# Altium PCB 2Motor16servoV3.PcbDoc (part 2 of 3)
Units mil, origin at the board's own origin, x right, y up, seen from the top; angles counter-clockwise.
Board outline 6000 x 4000 mil, 2 copper layers (Top Layer, Bottom Layer); 79 components, 93 nets, 290 pads, 78 vias.
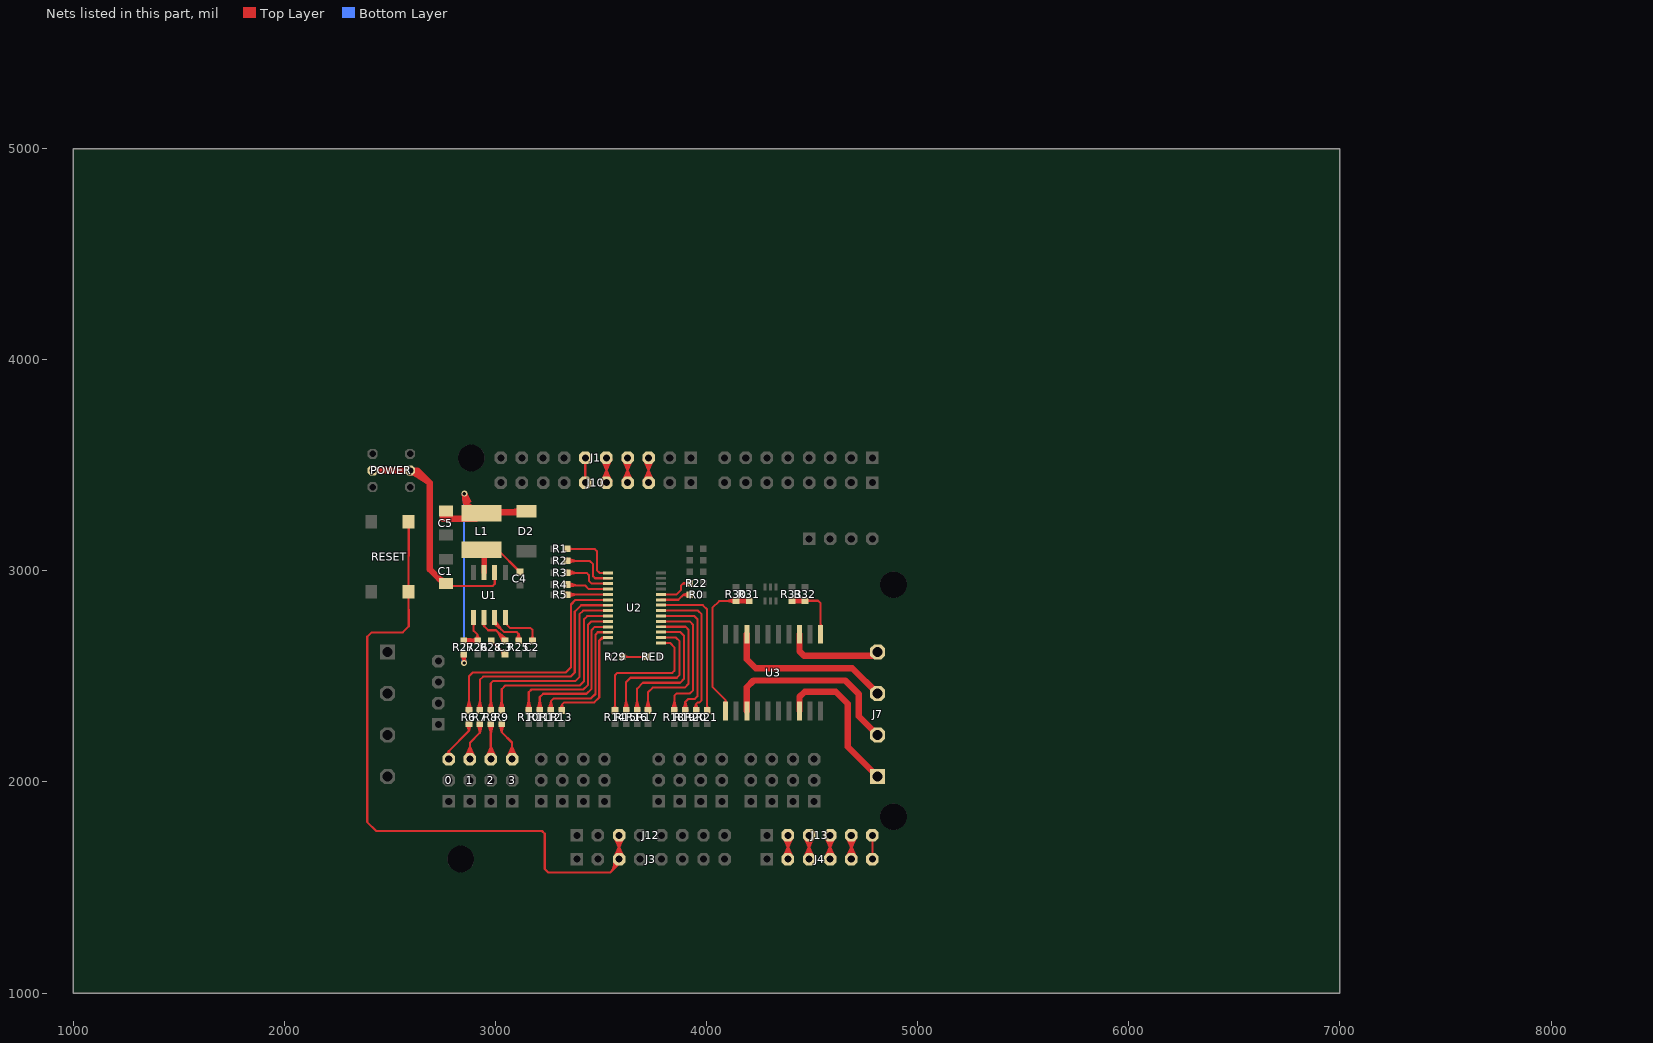
[diagram p2: the nets of this part, all layers, seen from the top]

## Via types
v1: diameter 23.62, hole 11.81, Top Layer to Bottom Layer, tented both sides, 50 vias
v2: diameter 27.56, hole 15.75, Top Layer to Bottom Layer, tented both sides, 28 vias

## Nets (pads, with @x,y where several pads share a name; then routed paths per layer and width w, separated by ;. In a path a pad name is that pad's centre, name@x,y a point inside that pad or via, vN(x,y) a via of type N, cw(c..) or ccw(c..) an arc to the next point about the centre after c; other vN are vias at no path point) (continued)
GPIO16: J1.3 J10.3 | length 1097.1
  Top Layer w10: J10.3@3701,3423.05 3725,3477.53 ; J1.3@3701,3529.95 3725,3475.47 ; J10.3@3707.66,3435.34 ccw(c3665.79,3477.21) 3725,3477.21 ccw(c3784.21,3477.21) J10.3@3742.34,3435.34 ; J10.3@3710.58,3419.77 3725,3477.53 ; J1.3@3710.58,3533.23 3725,3475.47 ; J10.3@3714.73,3428.27 ccw(c3689.93,3453.07) 3725,3453.07 ccw(c3760.07,3453.07) J10.3@3735.27,3428.27 ; J10.3@3725,3418 J1.3@3725,3535 3725,3475.47 ; J10.3@3739.42,3419.77 3725,3477.53 ; J1.3@3739.42,3533.23 3725,3475.47 ; J10.3@3749,3423.05 3725,3477.53 ; J1.3@3749,3529.95 3725,3475.47 ; 3725,3475.79 cw(c3784.21,3475.79) 3742.34,3517.66 ccw(c3784.21,3475.79) 3725,3475.79 ; 3725,3475.79 ccw(c3665.79,3475.79) 3707.66,3517.66 cw(c3665.79,3475.79) 3725,3475.79 ; 3725,3499.93 cw(c3760.07,3499.93) 3735.27,3524.73 ccw(c3760.07,3499.93) 3725,3499.93 ; 3725,3499.93 ccw(c3689.93,3499.93) 3714.73,3524.73 cw(c3689.93,3499.93) 3725,3499.93
NC1: J4.2 J13.2 | length 1092.1
  Top Layer w10: J4.2@4361,1640.05 4385,1694.53 ; J13.2@4361,1741.95 4385,1687.47 ; J4.2@4367.66,1652.34 ccw(c4325.79,1694.21) 4385,1694.21 ccw(c4444.21,1694.21) J4.2@4402.34,1652.34 ; J4.2@4370.58,1636.77 4385,1694.53 ; J13.2@4370.58,1745.23 4385,1687.47 ; J4.2@4374.73,1645.27 ccw(c4349.93,1670.07) 4385,1670.07 ccw(c4420.07,1670.07) J4.2@4395.27,1645.27 ; J4.2@4385,1635 J13.2@4385,1747 4385,1687.47 ; J4.2@4399.42,1636.77 4385,1694.53 ; J13.2@4399.42,1745.23 4385,1687.47 ; J4.2@4409,1640.05 4385,1694.53 ; J13.2@4409,1741.95 4385,1687.47 ; 4385,1687.79 cw(c4444.21,1687.79) 4402.34,1729.66 ccw(c4444.21,1687.79) 4385,1687.79 ; 4385,1687.79 ccw(c4325.79,1687.79) 4367.66,1729.66 cw(c4325.79,1687.79) 4385,1687.79 ; 4385,1711.93 cw(c4420.07,1711.93) 4395.27,1736.73 ccw(c4420.07,1711.93) 4385,1711.93 ; 4385,1711.93 ccw(c4349.93,1711.93) 4374.73,1736.73 cw(c4349.93,1711.93) 4385,1711.93
NC2: J4.3 J13.3 | length 1092.1
  Top Layer w10: J4.3@4461,1640.05 4485,1694.53 ; J13.3@4461,1741.95 4485,1687.47 ; J4.3@4467.66,1652.34 ccw(c4425.79,1694.21) 4485,1694.21 ccw(c4544.21,1694.21) J4.3@4502.34,1652.34 ; J4.3@4470.58,1636.77 4485,1694.53 ; J13.3@4470.58,1745.23 4485,1687.47 ; J4.3@4474.73,1645.27 ccw(c4449.93,1670.07) 4485,1670.07 ccw(c4520.07,1670.07) J4.3@4495.27,1645.27 ; J4.3@4485,1635 J13.3@4485,1747 4485,1687.47 ; J4.3@4499.42,1636.77 4485,1694.53 ; J13.3@4499.42,1745.23 4485,1687.47 ; J4.3@4509,1640.05 4485,1694.53 ; J13.3@4509,1741.95 4485,1687.47 ; 4485,1687.79 cw(c4544.21,1687.79) 4502.34,1729.66 ccw(c4544.21,1687.79) 4485,1687.79 ; 4485,1687.79 ccw(c4425.79,1687.79) 4467.66,1729.66 cw(c4425.79,1687.79) 4485,1687.79 ; 4485,1711.93 cw(c4520.07,1711.93) 4495.27,1736.73 ccw(c4520.07,1711.93) 4485,1711.93 ; 4485,1711.93 ccw(c4449.93,1711.93) 4474.73,1736.73 cw(c4449.93,1711.93) 4485,1711.93
NC3: J4.4 J13.4 | length 1092.1
  Top Layer w10: J4.4@4561,1640.05 4585,1694.53 ; J13.4@4561,1741.95 4585,1687.47 ; J4.4@4567.66,1652.34 ccw(c4525.79,1694.21) 4585,1694.21 ccw(c4644.21,1694.21) J4.4@4602.34,1652.34 ; J4.4@4570.58,1636.77 4585,1694.53 ; J13.4@4570.58,1745.23 4585,1687.47 ; J4.4@4574.73,1645.27 ccw(c4549.93,1670.07) 4585,1670.07 ccw(c4620.07,1670.07) J4.4@4595.27,1645.27 ; J4.4@4585,1635 J13.4@4585,1747 4585,1687.47 ; J4.4@4599.42,1636.77 4585,1694.53 ; J13.4@4599.42,1745.23 4585,1687.47 ; J4.4@4609,1640.05 4585,1694.53 ; J13.4@4609,1741.95 4585,1687.47 ; 4585,1687.79 cw(c4644.21,1687.79) 4602.34,1729.66 ccw(c4644.21,1687.79) 4585,1687.79 ; 4585,1687.79 ccw(c4525.79,1687.79) 4567.66,1729.66 cw(c4525.79,1687.79) 4585,1687.79 ; 4585,1711.93 cw(c4620.07,1711.93) 4595.27,1736.73 ccw(c4620.07,1711.93) 4585,1711.93 ; 4585,1711.93 ccw(c4549.93,1711.93) 4574.73,1736.73 cw(c4549.93,1711.93) 4585,1711.93
NC4: J4.5 J13.5 | length 1092.1
  Top Layer w10: J4.5@4661,1640.05 4685,1694.53 ; J13.5@4661,1741.95 4685,1687.47 ; J4.5@4667.66,1652.34 ccw(c4625.79,1694.21) 4685,1694.21 ccw(c4744.21,1694.21) J4.5@4702.34,1652.34 ; J4.5@4670.58,1636.77 4685,1694.53 ; J13.5@4670.58,1745.23 4685,1687.47 ; J4.5@4674.73,1645.27 ccw(c4649.93,1670.07) 4685,1670.07 ccw(c4720.07,1670.07) J4.5@4695.27,1645.27 ; J4.5@4685,1635 J13.5@4685,1747 4685,1687.47 ; J4.5@4699.42,1636.77 4685,1694.53 ; J13.5@4699.42,1745.23 4685,1687.47 ; J4.5@4709,1640.05 4685,1694.53 ; J13.5@4709,1741.95 4685,1687.47 ; 4685,1687.79 cw(c4744.21,1687.79) 4702.34,1729.66 ccw(c4744.21,1687.79) 4685,1687.79 ; 4685,1687.79 ccw(c4625.79,1687.79) 4667.66,1729.66 cw(c4625.79,1687.79) 4685,1687.79 ; 4685,1711.93 cw(c4720.07,1711.93) 4695.27,1736.73 ccw(c4720.07,1711.93) 4685,1711.93 ; 4685,1711.93 ccw(c4649.93,1711.93) 4674.73,1736.73 cw(c4649.93,1711.93) 4685,1711.93
NC5: J4.6 J13.6 | length 112
  Top Layer w10: J4.6@4785,1635 J13.6@4785,1747
NC6: J1.6 J10.6 | length 117
  Top Layer w10: J10.6@3425,3418 J1.6@3425,3535
NC11: J1.5 J10.5 | length 1097.1
  Top Layer w10: J10.5@3501,3423.05 3525,3477.53 ; J1.5@3501,3529.95 3525,3475.47 ; J10.5@3507.66,3435.34 ccw(c3465.79,3477.21) 3525,3477.21 ccw(c3584.21,3477.21) J10.5@3542.34,3435.34 ; J10.5@3510.58,3419.77 3525,3477.53 ; J1.5@3510.58,3533.23 3525,3475.47 ; J10.5@3514.73,3428.27 ccw(c3489.93,3453.07) 3525,3453.07 ccw(c3560.07,3453.07) J10.5@3535.27,3428.27 ; J10.5@3525,3418 J1.5@3525,3535 3525,3475.47 ; J10.5@3539.42,3419.77 3525,3477.53 ; J1.5@3539.42,3533.23 3525,3475.47 ; J10.5@3549,3423.05 3525,3477.53 ; J1.5@3549,3529.95 3525,3475.47 ; 3525,3475.79 cw(c3584.21,3475.79) 3542.34,3517.66 ccw(c3584.21,3475.79) 3525,3475.79 ; 3525,3475.79 ccw(c3465.79,3475.79) 3507.66,3517.66 cw(c3465.79,3475.79) 3525,3475.79 ; 3525,3499.93 cw(c3560.07,3499.93) 3535.27,3524.73 ccw(c3560.07,3499.93) 3525,3499.93 ; 3525,3499.93 ccw(c3489.93,3499.93) 3514.73,3524.73 cw(c3489.93,3499.93) 3525,3499.93
NC12: J1.4 J10.4 | length 1097.1
  Top Layer w10: J10.4@3601,3423.05 3625,3477.53 ; J1.4@3601,3529.95 3625,3475.47 ; J10.4@3607.66,3435.34 ccw(c3565.79,3477.21) 3625,3477.21 ccw(c3684.21,3477.21) J10.4@3642.34,3435.34 ; J10.4@3610.58,3419.77 3625,3477.53 ; J1.4@3610.58,3533.23 3625,3475.47 ; J10.4@3614.73,3428.27 ccw(c3589.93,3453.07) 3625,3453.07 ccw(c3660.07,3453.07) J10.4@3635.27,3428.27 ; J10.4@3625,3418 J1.4@3625,3535 3625,3475.47 ; J10.4@3639.42,3419.77 3625,3477.53 ; J1.4@3639.42,3533.23 3625,3475.47 ; J10.4@3649,3423.05 3625,3477.53 ; J1.4@3649,3529.95 3625,3475.47 ; 3625,3475.79 cw(c3684.21,3475.79) 3642.34,3517.66 ccw(c3684.21,3475.79) 3625,3475.79 ; 3625,3475.79 ccw(c3565.79,3475.79) 3607.66,3517.66 cw(c3565.79,3475.79) 3625,3475.79 ; 3625,3499.93 cw(c3660.07,3499.93) 3635.27,3524.73 ccw(c3660.07,3499.93) 3625,3499.93 ; 3625,3499.93 ccw(c3589.93,3499.93) 3614.73,3524.73 cw(c3589.93,3499.93) 3625,3499.93
NetC1_1: C1.1 POWER.2 U1.2 | length 1493.8
  Top Layer w10: C1.1@2765.99,2929.01 2987.01,2929.01 2996,2938 U1.2@2996,2993 ; U1.2@2991.18,2964.56 cw(c2979.56,2952.93) 2996,2952.93 cw(c3012.44,2952.93) U1.2@3000.82,2964.56
  Top Layer w30: POWER.2@2418,3475.74 POWER.2@2595.17,3475.74 ; 2481.54,3475.74 POWER.2@2595.17,3475.74 ; POWER.2@2595.17,3467.12 cw(c2595.17,3363.99) 2668.09,3436.91 ; C1.1@2733.7,2961.3 ccw(c2757.13,2984.73) C1.1@2757.13,2951.6 ; C1.1@2765.99,2929.01 2688,3007 2688,3417 ; POWER.2@2595.17,3475.74 2629.26,3475.74 ; POWER.2@2595.17,3475.74 2688,3417 ; POWER.2@2595.17,3475.74 2629.26,3475.74 ; 2629.26,3475.74 2688,3417
NetC2_1: C2.1 U1.8 | length 277.9
  Top Layer w10: U1.8@3046,2778.43 3046,2752 3069,2729 3166,2729 3174.59,2720.41 C2.1@3174.59,2669.59 ; U1.8@3052.81,2754.81 ccw(c3076.04,2754.81) 3059.61,2738.39 ; C2.1@3166.99,2677.19 ccw(c3148.64,2695.54) 3174.59,2695.54 ccw(c3200.54,2695.54) C2.1@3182.19,2677.19
NetC3_1: C3.1 U1.6 | length 659.4
  Top Layer w10: U1.6@2939.33,2753.43 2946,2738 ; U1.6@2946,2754.81 2946,2738 ; U1.6@2946,2778.43 2946,2738 ; U1.6@2952.67,2753.43 2946,2738 ; 3010.72,2710.02 cw(c2972.07,2660.97) C3.1@3034.08,2668.32 ; 3011.23,2710.44 ccw(c3066.5,2739.47) C3.1@3047.95,2679.85 ; 3021.7,2699.3 cw(c2991.99,2669.59) C3.1@3034.01,2669.59 ; 3022.45,2689.06 ccw(c3056.36,2706.87) C3.1@3044.98,2670.3 ; 3029.68,2695.08 cw(c3005.98,2664.99) C3.1@3044.01,2669.5 ; C3.1@3034.05,2670.58 ccw(c3008.21,2672.96) 3028.17,2689.54 ccw(c3048.12,2706.13) C3.1@3045.74,2680.29 ; C3.1@3035.82,2663.62 3011.96,2709.04 ; C3.1@3052.25,2677.29 3011.96,2709.04 ; 2946,2738 2965,2719 3002,2719 3044.76,2676.24 C3.1@3044.76,2669.59 3011.96,2709.04 ; 2946,2738.37 cw(c2962.44,2738.37) 2950.82,2749.99 ccw(c2962.44,2738.37) 2946,2738.37 ; 2946,2738.37 ccw(c2929.56,2738.37) 2941.18,2749.99 cw(c2929.56,2738.37) 2946,2738.37
NetC3_2: C3.2 R28.2 | length 131.7
  Top Layer w10: R28.2@2979.84,2669.4 3042.64,2606.6 C3.2@3044.76,2606.6 ; 3022.8,2626.44 ccw(c3044.76,2648.4) C3.2@3044.76,2617.35 ; 3027.9,2621.33 cw(c3013.17,2606.6) C3.2@3034.01,2606.6
NetC4_1: C4.1 L1.2 U1.3 | length 409.5
  Top Layer w10: L1.2@2946,3088.39 L1.2@2934,3100.39 3009.75,3100.39 C4.1@3115.54,2994.59
  Top Layer w25: U1.3@2946,2993 2946,3088.39 U1.3@2946,3016.62
NetC5_2: C5.2 D2.1 L1.1 R27.1 | length 4191.3
  Top Layer w10: R27.1@2839.37,2604.8 v2(2851,2564) ; R27.1@2842.4,2598.81 cw(c2821.64,2578.05) 2851,2578.05 ; R27.1@2842.58,2598.63 cw(c2824.67,2579.86) 2850.61,2580.47 cw(c2876.55,2581.08) R27.1@2857.78,2598.99 ; v2@2843.22,3365.79 2848.67,3322.31 ; R27.1@2843.23,2591.25 cw(c2854.82,2594.55) R27.1@2850.28,2605.72 ; v2@2843.26,3365.12 2852,3322.22 ; v2@2843.29,3364.87 2853.28,3322.23 v2@2860.76,3365.38 ; v2@2843.33,2568.27 ccw(c2824.81,2578.57) 2845.19,2584.38 ccw(c2865.57,2590.19) v2@2855.27,2571.67 ; v2@2843.46,3363.97 2857.85,3322.49 v2@2860.77,3366.29 ; v2@2843.85,3362.72 2864.39,3323.42 v2@2860.63,3367.61 ; v2@2844.42,3361.56 2870.94,3324.98 v2@2860.29,3368.89 ; v2@2844.65,2570.06 ccw(c2829.31,2584.69) 2850.5,2585.19 ccw(c2871.69,2585.69) v2@2857.06,2570.35 ; v2@2844.79,2570.21 ccw(c2829.8,2585.2) 2851,2585.2 ccw(c2872.2,2585.2) v2@2857.21,2570.21 ; v2@2844.92,3360.81 2875.56,3326.44 v2@2859.94,3369.75 ; v2@2845.34,3360.28 cw(c2829.26,3346.47) 2850.39,3344.87 cw(c2871.53,3343.26) v2@2857.72,3359.34 ; v2@2845.49,3360.11 2880.28,3328.2 v2@2859.49,3370.58 ; 2845.97,3353.45 cw(c2858.43,3356.37) v2@2851.32,3367.01 ; v2@2845.99,3359.6 cw(c2829.78,3342.37) 2852.54,3335.91 ; 2846.29,2580.53 cw(c2859.05,2584.16) R27.1@2854.05,2596.45 ; v2@2846.37,2571.46 ccw(c2835.21,2589.48) 2855.84,2584.64 ccw(c2876.48,2579.79) v2@2858.46,2568.63 ; v2@2846.34,3359.29 cw(c2813.45,3320.28) 2864.29,3324.61 ; v2@2847.43,3358.5 cw(c2820.87,3314.93) 2870.46,3326.96 ; v2@2847.61,3358.4 cw(c2837.01,3340.04) 2857.48,3345.53 ; 2847.9,3342.37 cw(c2861.83,3345.21) v2@2855.75,3358.06 ; 2848.24,3350.18 cw(c2864.76,3355.92) v2@2851.04,3366.76 ; v2@2849.16,3357.69 cw(c2832.65,3309.39) 2878.48,3331.87 ; 2849.26,3339.4 cw(c2867,3343.55) v2@2856.88,3358.7 ; v2@2849.42,3357.61 cw(c2845.32,3344.27) 2859.24,3343.34 ; R27.1@2850,2606.41 v2(2851,2564) ; v2@2850.04,3357.44 cw(c2847.88,3347.97) 2857.45,3346.31 ; v2@2850.78,3365.95 ccw(c2877.65,3367.11) 2859.47,3347.28 ; v2@2850.78,3366.07 ccw(c2877.63,3364.53) 2857.56,3346.63 ; v2@2850.8,3366.21 ccw(c2876.45,3361.75) 2855.37,3346.47 ; v2@2850.87,3366.47 ccw(c2871.29,3357.97) 2851.69,3347.73 ; 2851,2582.88 cw(c2873.53,2582.88) R27.1@2857.6,2598.81 ; R27.1@2851,2605.41 v2(2851,2564) ; L1.1@2852,3305.67 ccw(c2892.43,3305.67) L1.1@2876.69,3268.43 ; 2852,3320.75 ccw(c2898.8,3320.75) L1.1@2880.58,3277.64 ; 2852,3335.83 ccw(c2905.18,3335.83) L1.1@2884.48,3286.85 ; 2852,3350.91 ccw(c2911.55,3350.91) L1.1@2888.37,3296.06 ; v2@2852.39,3367.15 cw(c2843.7,3341.7) 2867.84,3353.55 ; v2@2852.52,3367.1 cw(c2841.08,3342.77) 2866.38,3351.89 ; v2@2852.64,3367.04 cw(c2838.64,3344.08) 2864.77,3350.42 ; v2@2852.79,3366.93 cw(c2835.46,3346.38) 2862.24,3348.66 ; v2@2852.84,3366.89 cw(c2842.47,3355.86) 2857.03,3351.73 ; 2854.22,3332.95 cw(c2881.73,3342.5) v2@2858.89,3360.56 ; 2856.1,3342.37 ccw(c2842.17,3345.21) 2848.25,3358.06 cw(c2826.56,3311.86) 2874.57,3329.18 ; 2857.49,3345.52 cw(c2877.96,3351.01) v2@2859.6,3361.61 ; v2@2860.1,3362.63 ccw(c2896.95,3347.28) 2861.58,3328.81 ; v2@2860.64,3364.46 2848.67,3322.31 ; v2@2860.65,3364.5 ccw(c2908.98,3356.09) 2869.26,3327.3 ; R27.1@2860.69,2605.3 v2(2851,2564) ; v2@2860.74,3365.12 2852,3322.22 ; v2@2860.77,3365.5 ccw(c2911.72,3362.58) 2873.62,3328.61 ; v2@2860.77,3366.38 ccw(c2911.76,3368.58) 2877.26,3330.97 ; L1.1@2892.26,3305.27 cw(c2917.92,3366) v2(2852,3366) ; L1.1@2907.54,3247.15 L1.1@2934,3273.61 ; L1.1@2938,3277.61 L1.1@2934,3273.61 ; 2848.67,3322.31 v2(2852,3366) ; 2852,3322.22 v2(2852,3366) ; 2852,3344.8 cw(c2873.2,3344.8) 2858.21,3359.79 ccw(c2873.2,3344.8) 2852,3344.8 ; 2852,3344.8 ccw(c2830.8,3344.8) 2845.79,3359.79 cw(c2830.8,3344.8) 2852,3344.8 ; v2(2852,3366) 2852,3302 2880.39,3273.61 L1.1@2934,3273.61
  Top Layer w30: C5.2@2757.13,3283.7 2749,3247.15 L1.1@2907.54,3247.15 ; L1.1@2938,3277.61 D2.1@3146,3277.61 ; 3079.93,3277.61 ccw(c3079.93,3331.46) D2.1@3118.01,3293.38
  Bottom Layer w10: v2@2842.26,2564.88 2851,2607.78 v2@2859.74,2564.88 ; v2@2843.25,3365.32 2851,3322.19 ; v2@2844.79,2570.21 ccw(c2829.8,2585.2) 2851,2585.2 ccw(c2872.2,2585.2) v2@2857.21,2570.21 ; v2@2845.65,3359.94 cw(c2830.33,3345.29) 2851.52,3344.81 cw(c2872.71,3344.33) v2@2858.06,3359.65 ; v2@2845.79,3359.79 cw(c2833.22,3347.22) 2851,3347.22 ; 2846.84,3345.33 cw(c2857.43,3347.23) v2@2854.44,3357.57 ; 2846.9,2587.63 ccw(c2860.83,2584.79) v2@2854.75,2571.94 ; v2@2847.25,2571.94 ccw(c2841.17,2584.79) 2855.1,2587.63 ; v2@2847.33,3358.57 cw(c2838.05,3343.82) 2855.04,3339.96 ; v2(2851,2564) v2@2851,3366 ; 2851,3342.39 cw(c2875.61,3342.39) v2@2858.21,3359.79 ; v2(2852,3366) 2851,3322.19 ; v2@2860.71,3364.92 2851,3322.19
NetR1_1: R1.1 U2.1 | length 368.6
  Top Layer w10: R1.1@3338.59,3103.59 3469.41,3103.59 3480,3093 3480,3003 3492.32,2990.68 ; R1.1@3346.19,3096.99 cw(c3362.12,3081.06) 3362.12,3103.59 ; R1.1@3346.19,3112.19 ccw(c3366.95,3132.95) 3366.95,3103.59 ; U2.1@3515.27,2990.68 3492.32,2990.68 ; U2.1@3544,2990.68 3492.32,2990.68
NetR2_1: R2.1 U2.2 | length 568.2
  Top Layer w10: R2.1@3338.59,3047.19 3445.81,3047.19 3462,3031 3462,2974 3470.91,2965.09 U2.2@3544,2965.09 ; R2.1@3338.59,3048.19 3384.36,3047.19 ; R2.1@3339.27,3047.88 cw(c3351.18,3042.33) 3354.52,3055.04 ; R2.1@3339.62,3037.49 3384.36,3047.19 ; R2.1@3340.09,3058.84 3384.36,3047.19 ; R2.1@3346.02,3040.43 cw(c3363.97,3021.68) 3364.53,3047.63 cw(c3365.1,3073.57) R2.1@3346.35,3055.62 ; R2.1@3346.19,3040.59 cw(c3362.12,3024.66) 3362.12,3047.19 ; R2.1@3346.19,3055.79 ccw(c3366.95,3076.55) 3366.95,3047.19 ; R2.1@3348.34,3043.66 cw(c3362.2,3037.21) 3366.09,3052 ; 3478.38,2965.09 U2.2@3515.27,2965.09
NetR3_1: R3.1 U2.3 | length 537.8
  Top Layer w10: R3.1@3338.59,2990.79 3431.21,2990.79 3442,2980 3442,2953 3455.5,2939.5 U2.3@3544,2939.5 ; R3.1@3338.59,2991.79 3384.36,2990.79 ; R3.1@3339.27,2991.48 cw(c3351.18,2985.94) 3354.52,2998.64 ; R3.1@3339.62,2981.1 3384.36,2990.79 ; R3.1@3340.09,3002.44 3384.36,2990.79 ; R3.1@3346.02,2984.03 cw(c3363.97,2965.29) 3364.53,2991.23 cw(c3365.1,3017.17) R3.1@3346.35,2999.23 ; R3.1@3346.19,2984.19 cw(c3362.12,2968.26) 3362.12,2990.79 ; R3.1@3346.19,2999.39 ccw(c3366.95,3020.16) 3366.95,2990.79 ; R3.1@3348.34,2987.26 cw(c3362.2,2980.81) 3366.09,2995.6 ; 3478.38,2939.5 U2.3@3515.27,2939.5
NetR4_1: R4.1 U2.4 | length 519.7
  Top Layer w10: R4.1@3338.82,2924.65 3384.85,2931 ; R4.1@3339.16,2934.92 cw(c3352.31,2923.93) 3357.81,2940.16 ; R4.1@3340.84,2945.91 3384.85,2931 ; R4.1@3341.99,2931 3425,2931 3442.09,2913.91 U2.4@3544,2913.91 ; R4.1@3341.99,2932 R4.1@3338.59,2935.4 3384.85,2931 ; R4.1@3345.44,2927.11 cw(c3361.97,2907.11) 3364.42,2932.94 cw(c3366.88,2958.77) R4.1@3346.88,2942.24 ; R4.1@3346.19,2927.8 cw(c3353.92,2920.07) R4.1@3353.92,2931 ; R4.1@3346.19,2943 ccw(c3375.15,2971.96) 3375.15,2931 ; R4.1@3346.84,2928.51 cw(c3364.32,2913.89) 3371.64,2935.48 ; 3478.38,2913.91 U2.4@3515.27,2913.91
NetR5_1: R5.1 U2.5 | length 505
  Top Layer w10: R5.1@3338.59,2888.31 U2.5@3544,2888.31 ; R5.1@3339.26,2887.34 ccw(c3351.35,2893.41) 3354.88,2880.34 ; R5.1@3339.54,2897.71 3384.39,2888.31 ; R5.1@3340.16,2876.37 3384.39,2888.31 ; R5.1@3340.91,2889.31 R5.1@3338.59,2887 3384.39,2888.31 ; R5.1@3345.97,2894.81 ccw(c3363.78,2913.68) 3364.53,2887.74 ccw(c3365.27,2861.81) R5.1@3346.41,2879.62 ; R5.1@3346.19,2879.4 cw(c3367.71,2857.88) 3367.71,2888.31 ; R5.1@3346.19,2894.6 ccw(c3361.37,2909.77) 3361.37,2888.31 ; R5.1@3348.2,2891.82 ccw(c3362.52,2899.01) 3366.7,2883.54 ; 3478.38,2888.31 U2.5@3515.27,2888.31
NetR6_1: R6.1 U2.6 | length 1398.4
  Top Layer w10: R6.1@2863.33,2339.85 2874,2384.34 R6.1@2884.67,2339.85 ; R6.1@2866.4,2346.19 ccw(c2848.05,2364.54) 2874,2364.54 ccw(c2899.95,2364.54) R6.1@2881.6,2346.19 ; R6.1@2866.55,2353.28 ccw(c2878.07,2350.51) R6.1@2874.24,2339.3 ; 2869.11,2363.95 ccw(c2881.63,2360.95) R6.1@2877.47,2348.76 ; R6.1@2870.53,2348.76 ccw(c2866.37,2360.95) 2878.89,2363.95 ; R6.1@2873.76,2339.3 ccw(c2869.93,2350.51) R6.1@2881.45,2353.28 ; R6.1@2874,2338.59 2874,2501 2892,2519 3332,2519 3357,2544 3357,2841 3378.72,2862.72 U2.6@3544,2862.72 ; 3478.38,2862.72 U2.6@3515.27,2862.72
NetR7_1: R7.1 U2.7 | length 1320.7
  Top Layer w10: R7.1@2914.99,2339.85 2925.67,2384.34 R7.1@2936.34,2339.85 ; R7.1@2918.07,2346.19 ccw(c2899.72,2364.54) 2925.67,2364.54 ccw(c2951.61,2364.54) R7.1@2933.27,2346.19 ; R7.1@2918.21,2353.28 ccw(c2929.74,2350.51) R7.1@2925.91,2339.3 ; 2920.78,2363.95 ccw(c2933.3,2360.95) R7.1@2929.14,2348.76 ; R7.1@2922.19,2348.76 ccw(c2918.04,2360.95) 2930.56,2363.95 ; R7.1@2925.43,2339.3 ccw(c2921.6,2350.51) R7.1@2933.12,2353.28 ; R7.1@2925.67,2338.59 2925.67,2483.67 2941,2499 3355,2499 3375,2519 3375,2807 3405.13,2837.13 U2.7@3544,2837.13 ; 3478.38,2837.13 U2.7@3515.27,2837.13
NetR8_1: R8.1 U2.8 | length 1254.2
  Top Layer w10: R8.1@2966.66,2339.85 2977.33,2384.34 R8.1@2988.01,2339.85 ; R8.1@2969.73,2346.19 ccw(c2951.39,2364.54) 2977.33,2364.54 ccw(c3003.28,2364.54) R8.1@2984.93,2346.19 ; R8.1@2969.88,2353.28 ccw(c2981.4,2350.51) R8.1@2977.57,2339.3 ; 2972.44,2363.95 ccw(c2984.96,2360.95) R8.1@2980.8,2348.76 ; R8.1@2973.86,2348.76 ccw(c2969.7,2360.95) 2982.22,2363.95 ; R8.1@2977.09,2339.3 ccw(c2973.26,2350.51) R8.1@2984.79,2353.28 ; R8.1@2977.33,2338.59 2977.33,2467.33 2989,2479 3379,2479 3397,2497 3397,2794 3414.54,2811.54 U2.8@3544,2811.54 ; 3478.38,2811.54 U2.8@3515.27,2811.54
NetR9_1: R9.1 U2.9 | length 1174.1
  Top Layer w10: R9.1@3018.33,2339.85 3029,2384.34 R9.1@3039.67,2339.85 ; R9.1@3021.4,2346.19 ccw(c3003.05,2364.54) 3029,2364.54 ccw(c3054.95,2364.54) R9.1@3036.6,2346.19 ; R9.1@3021.55,2353.28 ccw(c3033.07,2350.51) R9.1@3029.24,2339.3 ; 3024.11,2363.95 ccw(c3036.63,2360.95) R9.1@3032.47,2348.76 ; R9.1@3025.53,2348.76 ccw(c3021.37,2360.95) 3033.89,2363.95 ; R9.1@3028.76,2339.3 ccw(c3024.93,2350.51) R9.1@3036.45,2353.28 ; R9.1@3029,2338.59 3029,2440 3047,2458 3400,2458 3419,2477 3419,2771 3433.95,2785.95 U2.9@3544,2785.95 ; 3478.38,2785.95 U2.9@3515.27,2785.95
NetR10_1: R10.1 U2.10 | length 1021.5
  Top Layer w10: R10.1@3146.33,2339.85 3157,2384.34 R10.1@3167.67,2339.85 ; R10.1@3149.4,2346.19 ccw(c3131.05,2364.54) 3157,2364.54 ccw(c3182.95,2364.54) R10.1@3164.6,2346.19 ; R10.1@3149.55,2353.28 ccw(c3161.07,2350.51) R10.1@3157.24,2339.3 ; 3152.11,2363.95 ccw(c3164.63,2360.95) R10.1@3160.47,2348.76 ; R10.1@3153.53,2348.76 ccw(c3149.37,2360.95) 3161.89,2363.95 ; R10.1@3156.76,2339.3 ccw(c3152.93,2350.51) R10.1@3164.45,2353.28 ; R10.1@3157,2338.59 3157,2425 3170,2438 3416,2438 3437,2459 3437,2744 3453.36,2760.36 U2.10@3544,2760.36 ; 3478.38,2760.36 U2.10@3515.27,2760.36
NetR11_1: R11.1 U2.11 | length 941.2
  Top Layer w10: R11.1@3198.66,2339.85 3209.33,2384.34 R11.1@3220.01,2339.85 ; R11.1@3201.73,2346.19 ccw(c3183.39,2364.54) 3209.33,2364.54 ccw(c3235.28,2364.54) R11.1@3216.93,2346.19 ; R11.1@3201.88,2353.28 ccw(c3213.4,2350.51) R11.1@3209.57,2339.3 ; 3204.44,2363.95 ccw(c3216.96,2360.95) R11.1@3212.81,2348.76 ; R11.1@3205.86,2348.76 ccw(c3201.7,2360.95) 3214.22,2363.95 ; R11.1@3209.09,2339.3 ccw(c3205.26,2350.51) R11.1@3216.79,2353.28 ; R11.1@3209.33,2338.59 3209.33,2402.33 3225,2418 3431,2418 3455,2442 3455,2720 3469.77,2734.77 U2.11@3544,2734.77 ; 3478.38,2734.77 U2.11@3515.27,2734.77
NetR12_1: R12.1 U2.12 | length 857
  Top Layer w10: R12.1@3251,2339.9 3261.67,2382.67 ; R12.1@3254.07,2346.19 ccw(c3235.72,2364.54) 3261.67,2364.54 ccw(c3287.61,2364.54) R12.1@3269.27,2346.19 ; R12.1@3254.25,2352.92 ccw(c3265.29,2350.17) R12.1@3261.89,2339.3 ; 3256.81,2363.21 ccw(c3268.46,2360.3) R12.1@3264.88,2348.85 ; R12.1@3258.46,2348.85 ccw(c3254.87,2360.3) 3266.52,2363.21 ; R12.1@3261.44,2339.3 ccw(c3258.05,2350.17) R12.1@3269.09,2352.92 ; R12.1@3261.67,2338.59 3261.67,2382.67 ; R12.1@3272.33,2339.9 3261.67,2382.67 ; U2.12@3515.27,2709.18 3484.18,2709.18 ; U2.12@3544,2709.18 3484.18,2709.18 ; 3261.67,2382.67 3275,2396 3452,2396 3473,2417 3473,2698 3484.18,2709.18
NetR13_1: R13.1 U2.13 | length 719.7
  Top Layer w10: R13.1@3303.46,2340.7 3314,2366 ; R13.1@3306.4,2346.19 ccw(c3288.05,2364.54) 3314,2364.54 ccw(c3339.95,2364.54) R13.1@3321.6,2346.19 ; R13.1@3314,2338.59 3314,2366 ; R13.1@3324.54,2340.7 3314,2366 ; 3492.11,2672.11 cw(c3515.27,2648.95) U2.13@3515.27,2681.7 ; U2.13@3544,2683.59 3503.59,2683.59 ; 3314,2366 3325,2377 3468,2377 3491,2400 3491,2671 ; 3491,2671 U2.13@3515.27,2683.59 ; 3491,2671 3503.59,2683.59 ; 3503.59,2683.59 U2.13@3515.27,2683.59 ; 3503.59,2683.59 U2.13@3515.27,2683.59
NetR14_1: R14.1 U2.15 | length 707.9
  Top Layer w10: R14.1@3558.4,2346.19 ccw(c3540.05,2364.54) 3566,2364.54 ccw(c3591.95,2364.54) R14.1@3573.6,2346.19 ; R14.1@3566,2338.59 3566,2506 3577,2517 3837,2517 3847,2527 3847,2638 3826.02,2658.98 ; U2.15@3782.97,2658.98 3826.02,2658.98 ; U2.15@3799.7,2658.98 3826.02,2658.98
NetR15_1: R15.1 U2.16 | length 899.5
  Top Layer w10: R15.1@3607.99,2339.85 3618.67,2384.34 R15.1@3629.34,2339.85 ; R15.1@3611.07,2346.19 ccw(c3592.72,2364.54) 3618.67,2364.54 ccw(c3644.61,2364.54) R15.1@3626.27,2346.19 ; R15.1@3611.21,2353.28 ccw(c3622.74,2350.51) R15.1@3618.91,2339.3 ; 3613.78,2363.95 ccw(c3626.3,2360.95) R15.1@3622.14,2348.76 ; R15.1@3615.2,2348.76 ccw(c3611.04,2360.95) 3623.56,2363.95 ; R15.1@3618.43,2339.3 ccw(c3614.6,2350.51) R15.1@3626.12,2353.28 ; R15.1@3618.67,2338.59 3618.67,2473.67 3639,2494 3858,2494 3872,2508 3872,2666 3853.51,2684.49 U2.16@3782.97,2684.49 ; U2.16@3799.7,2684.49 3836.59,2684.49
NetR16_1: R16.1 U2.17 | length 908.2
  Top Layer w10: R16.1@3659.66,2339.85 3670.33,2384.34 R16.1@3681.01,2339.85 ; R16.1@3662.73,2346.19 ccw(c3644.39,2364.54) 3670.33,2364.54 ccw(c3696.28,2364.54) R16.1@3677.93,2346.19 ; R16.1@3662.88,2353.28 ccw(c3674.4,2350.51) R16.1@3670.58,2339.3 ; 3665.44,2363.95 ccw(c3677.96,2360.95) R16.1@3673.81,2348.76 ; R16.1@3666.86,2348.76 ccw(c3662.7,2360.95) 3675.22,2363.95 ; R16.1@3670.09,2339.3 ccw(c3666.26,2350.51) R16.1@3677.79,2353.28 ; R16.1@3670.33,2338.59 3670.33,2442.33 3698,2470 3874,2470 3892,2488 3892,2694 3875.99,2710.01 U2.17@3782.97,2710.01 ; U2.17@3799.7,2710.01 3836.59,2710.01
NetR17_1: R17.1 U2.18 | length 930.8
  Top Layer w10: R17.1@3711.33,2339.85 3722,2384.34 R17.1@3732.67,2339.85 ; R17.1@3714.4,2346.19 ccw(c3696.05,2364.54) 3722,2364.54 ccw(c3747.95,2364.54) R17.1@3729.6,2346.19 ; R17.1@3714.55,2353.28 ccw(c3726.07,2350.51) R17.1@3722.24,2339.3 ; 3717.11,2363.95 ccw(c3729.63,2360.95) R17.1@3725.47,2348.76 ; R17.1@3718.53,2348.76 ccw(c3714.37,2360.95) 3726.89,2363.95 ; R17.1@3721.76,2339.3 ccw(c3717.93,2350.51) R17.1@3729.45,2353.28 ; R17.1@3722,2338.59 3722,2425 3744,2447 3896,2447 3914,2465 3914,2722 3900.48,2735.52 U2.18@3782.97,2735.52 ; U2.18@3799.7,2735.52 3836.59,2735.52
NetR18_1: R18.1 U2.19 | length 881.5
  Top Layer w10: U2.19@3782.97,2761.04 3918.96,2761.04 3936,2744 3936,2435 3921,2420 3858,2420 3847,2409 R18.1@3847,2338.59 ; U2.19@3799.7,2761.04 3836.59,2761.04 ; R18.1@3836.33,2339.85 3847,2384.34 R18.1@3857.67,2339.85 ; R18.1@3839.4,2346.19 ccw(c3821.05,2364.54) 3847,2364.54 ccw(c3872.95,2364.54) R18.1@3854.6,2346.19 ; R18.1@3839.55,2353.28 ccw(c3851.07,2350.51) R18.1@3847.24,2339.3 ; 3842.11,2363.95 ccw(c3854.63,2360.95) R18.1@3850.47,2348.76 ; R18.1@3843.53,2348.76 ccw(c3839.37,2360.95) 3851.89,2363.95 ; R18.1@3846.76,2339.3 ccw(c3842.93,2350.51) R18.1@3854.45,2353.28
NetR19_1: R19.1 U2.20 | length 811.6
  Top Layer w10: U2.20@3782.97,2786.55 3941.45,2786.55 3956,2772 3956,2406 3943,2393 3913,2393 3898.67,2378.67 ; U2.20@3799.7,2786.55 3836.59,2786.55 ; R19.1@3888.02,2340.03 3898.67,2378.67 ; R19.1@3891.07,2346.19 ccw(c3872.72,2364.54) 3898.67,2364.54 ccw(c3924.61,2364.54) R19.1@3906.27,2346.19 ; R19.1@3898.67,2338.59 3898.67,2378.67 ; R19.1@3909.32,2340.03 3898.67,2378.67
NetR20_1: R20.1 U2.21 | length 812.9
  Top Layer w10: U2.21@3782.97,2812.07 3958.76,2812.07 3976,2794.83 3976,2388 3964,2376 3956,2376 3950.33,2370.33 ; U2.21@3799.7,2812.07 3836.59,2812.07 ; R20.1@3939.74,2340.41 3950.33,2370.33 ; R20.1@3942.73,2346.19 ccw(c3924.39,2364.54) 3950.33,2364.54 ccw(c3976.28,2364.54) R20.1@3957.93,2346.19 ; R20.1@3950.33,2338.59 3950.33,2370.33 ; R20.1@3960.93,2340.41 3950.33,2370.33
NetR21_1: R21.1 U2.22 | length 783.6
  Top Layer w10: U2.22@3782.97,2837.58 3981.42,2837.58 4002,2817 R21.1@4002,2338.59 ; U2.22@3799.7,2837.58 3836.59,2837.58 ; R21.1@3994.4,2346.19 ccw(c3976.05,2364.54) 4002,2364.54 ccw(c4027.95,2364.54) R21.1@4009.6,2346.19
NetR22_1: R22.1 U2.24 | length 379.4
  Top Layer w10: U2.24@3783,2888.61 3857.61,2888.61 3878,2909 3878,2929 3890.4,2941.4 ; U2.24@3799.73,2888.61 3836.62,2888.61 ; R22.1@3918.48,2930.82 3890.4,2941.4 ; R22.1@3918.48,2951.97 3890.4,2941.4 ; 3890.4,2941.4 R22.1@3920.41,2941.4 3890.4,2941.4 ; 3894.46,2941.4 cw(c3894.46,2915.45) 3912.81,2933.8 ccw(c3894.46,2915.45) 3894.46,2941.4 ; 3894.46,2941.4 ccw(c3894.46,2967.35) 3912.81,2949 cw(c3894.46,2967.35) 3894.46,2941.4
NetR25_1: R25.1 U1.7 | length 538.6
  Top Layer w10: U1.7@2991.51,2749.69 3026.55,2723.45 ; U1.7@2994.86,2748.1 cw(c2988.2,2709.03) 3020.53,2731.95 ; U1.7@2995.91,2748 cw(c2995.7,2731.56) 3007.47,2743.03 cw(c3019.25,2754.51) U1.7@3002.81,2754.72 ; U1.7@2996,2748 cw(c2996,2733.52) U1.7@3006.24,2743.76 ; U1.7@2996,2754.81 3026.55,2723.45 ; U1.7@2996,2778.43 2996,2754 3039,2711 3099,2711 3109.67,2700.33 ; U1.7@3001.23,2759.17 3026.55,2723.45 ; U1.7@3002.74,2755.78 ccw(c3041.97,2761.41) 3018.21,2729.69 ; U1.7@3002.81,2754.81 ccw(c3021.21,2754.81) 3008.2,2741.8 ; R25.1@3099.09,2671.47 3109.67,2700.33 ; R25.1@3102.07,2677.19 ccw(c3083.72,2695.54) 3109.67,2695.54 ccw(c3135.62,2695.54) R25.1@3117.27,2677.19 ; R25.1@3109.67,2669.59 3109.67,2700.33 ; R25.1@3120.26,2671.47 3109.67,2700.33
NetR26_2: R26.2 R27.2 U1.5 | length 2324.5
  Top Layer w10: R27.2@2849.73,2658.66 2896.44,2662.86 ; R27.2@2849.73,2680.15 2896.44,2675.94 ; R27.2@2850.51,2668.86 cw(c2863.76,2654.81) 2870.74,2672.82 ; R27.2@2850.51,2669.95 ccw(c2863.76,2683.99) 2870.74,2665.99 ; R27.2@2852.71,2659 2896.44,2675.94 ; R27.2@2852.71,2679.8 2896.44,2662.86 ; R27.2@2855.62,2660.24 cw(c2877.16,2625.1) 2886.78,2665.18 ; R27.2@2855.62,2678.56 ccw(c2877.16,2713.71) 2886.78,2673.63 ; R27.2@2856.47,2660.82 cw(c2872.07,2640.09) 2875.69,2665.78 cw(c2879.31,2691.48) R27.2@2858.59,2675.87 ; R27.2@2856.47,2677.99 ccw(c2872.07,2698.72) 2875.69,2673.02 ccw(c2879.31,2647.33) R27.2@2858.59,2662.94 ; R27.2@2857.37,2661.58 cw(c2875.81,2642.04) 2885.52,2667.09 ; R27.2@2857.37,2677.22 ccw(c2875.81,2696.77) 2885.52,2671.71 ; 2865.78,2664.06 cw(c2883.65,2617.93) R26.2@2909.34,2660.22 ; 2865.78,2668.59 ccw(c2868.27,2658.2) R27.2@2859.16,2663.78 ; 2865.78,2670.22 cw(c2868.27,2680.6) R27.2@2859.16,2675.02 ; 2865.78,2674.74 ccw(c2883.65,2720.87) R26.2@2909.34,2678.59 ; 2881.2,2665.01 ccw(c2884.86,2691.03) R26.2@2906.19,2675.68 ; 2881.2,2673.8 cw(c2884.86,2647.77) R26.2@2906.19,2663.12 ; 2884.7,2667.41 ccw(c2896.94,2698.99) R26.2@2914.53,2670.04 ; 2884.7,2671.4 cw(c2896.94,2639.81) R26.2@2914.53,2668.76 ; 2889.55,2664.51 ccw(c2892.56,2677.03) R26.2@2904.75,2672.87 ; 2889.55,2674.29 cw(c2892.56,2661.77) R26.2@2904.75,2665.93 ; U1.5@2891.18,2749.99 cw(c2879.56,2738.37) 2896,2738.37 cw(c2912.44,2738.37) U1.5@2900.82,2749.99 ; U1.5@2896,2778.43 2896,2716 2914.92,2697.08 ; 2897.59,2662.7 ccw(c2900.04,2680.11) R26.2@2914.31,2669.84 ; 2897.59,2676.11 cw(c2900.04,2658.69) R26.2@2914.31,2668.96 ; R26.2@2900.23,2661.95 ccw(c2903,2673.47) R26.2@2914.21,2669.64 ; R26.2@2900.23,2676.85 cw(c2903,2665.33) R26.2@2914.21,2669.16 ; R26.2@2904.37,2671.49 2914.92,2697.08 ; R26.2@2913.66,2658.73 2869.17,2669.4 ; R26.2@2913.66,2680.08 2869.17,2669.4 ; R26.2@2922.52,2677 cw(c2940.87,2695.35) 2914.92,2695.35 cw(c2888.97,2695.35) R26.2@2907.32,2677 ; R26.2@2925.46,2671.49 2914.92,2697.08 ; R27.2@2850,2669.4 2869.17,2669.4 ; R27.2@2850,2669.4 2896.44,2675.94 ; R27.2@2850,2669.4 2869.17,2669.4 ; R27.2@2850,2669.4 2896.44,2662.86 ; R27.2@2850,2669.4 R26.2@2914.92,2669.4 ; R27.2@2853.01,2659.08 2869.17,2669.4 ; R27.2@2853.01,2659.08 2869.17,2669.4 ; R27.2@2853.01,2659.08 2869.17,2669.4 ; R27.2@2853.01,2679.72 2869.17,2669.4 ; R27.2@2853.01,2679.72 2869.17,2669.4 ; R27.2@2853.01,2679.72 2869.17,2669.4 ; R27.2@2859.17,2663.8 cw(c2869.17,2657.68) 2869.17,2669.4 ; R27.2@2859.17,2663.8 cw(c2869.17,2657.68) 2869.17,2669.4 ; R27.2@2859.17,2663.8 cw(c2869.17,2657.68) 2869.17,2669.4 ; R27.2@2859.17,2675.01 ccw(c2869.17,2681.12) 2869.17,2669.4 ; R27.2@2859.17,2675.01 ccw(c2869.17,2681.12) 2869.17,2669.4 ; R27.2@2859.17,2675.01 ccw(c2869.17,2681.12) 2869.17,2669.4 ; 2869.17,2669.4 R26.2@2914.92,2669.4 ; 2875.95,2669.4 cw(c2875.95,2695.35) 2857.6,2677 ccw(c2875.95,2695.35) 2875.95,2669.4 ; 2875.95,2669.4 ccw(c2875.95,2643.45) 2857.6,2661.8 cw(c2875.95,2643.45) 2875.95,2669.4 ; 2888.97,2669.4 cw(c2888.97,2643.45) 2907.32,2661.8 ccw(c2888.97,2643.45) 2888.97,2669.4 ; 2888.97,2669.4 ccw(c2888.97,2695.35) R26.2@2907.32,2677 ; 2888.97,2669.4 ccw(c2888.97,2695.35) R26.2@2907.32,2677 ; 2895.75,2669.4 2851.26,2658.73 2895.75,2669.4 ; 2895.75,2669.4 2851.26,2680.08 2895.75,2669.4 ; R26.2@2914.92,2669.4 2914.92,2697.08 ; R27.2@2850.71,2669.16 cw(c2861.92,2665.33) 2864.69,2676.85 ccw(c2861.92,2665.33) R27.2@2850.71,2669.16 ; R27.2@2850.71,2669.64 ccw(c2861.92,2673.47) 2864.69,2661.95 cw(c2861.92,2673.47) R27.2@2850.71,2669.64 ; R27.2@2860.17,2665.93 cw(c2872.36,2661.77) 2875.36,2674.29 ccw(c2872.36,2661.77) R27.2@2860.17,2665.93 ; R27.2@2860.17,2672.87 ccw(c2872.36,2677.03) 2875.36,2664.51 cw(c2872.36,2677.03) R27.2@2860.17,2672.87 ; 2877.82,2661.18 ccw(c2874.01,2703.56) 2906.67,2676.29 cw(c2874.01,2703.56) 2877.82,2661.18 ; 2877.82,2677.62 cw(c2874.01,2635.25) 2906.67,2662.51 ccw(c2874.01,2635.25) 2877.82,2677.62 ; 2878.14,2665.18 cw(c2887.76,2625.1) 2909.3,2660.24 ccw(c2887.76,2625.1) 2878.14,2665.18 ; 2878.14,2673.63 ccw(c2887.76,2713.71) 2909.3,2678.56 cw(c2887.76,2713.71) 2878.14,2673.63 ; 2899.14,2668.59 cw(c2896.65,2658.2) 2905.75,2663.78 ccw(c2896.65,2658.2) 2899.14,2668.59 ; 2899.14,2670.22 ccw(c2896.65,2680.6) 2905.75,2675.02 cw(c2896.65,2680.6) 2899.14,2670.22
NetR29_1: R29.1 RED.1 | length 198.3
  Top Layer w10: R29.1@3599.59,2593 RED.1@3716.41,2593 ; R29.1@3607.19,2585.4 cw(c3625.54,2567.05) 3625.54,2593 cw(c3625.54,2618.95) R29.1@3607.19,2600.6 ; RED.1@3708.81,2585.4 ccw(c3690.46,2567.05) 3690.46,2593 ccw(c3690.46,2618.95) RED.1@3708.81,2600.6
NetR30_1: R30.1 R31.2 U3.1 | length 3471.2
  Top Layer w10: U3.1@4083.29,2369.58 4090,2388 ; U3.1@4090,2335.91 4090,2388 ; U3.1@4090,2368.39 4090,2388 ; U3.1@4096.71,2369.58 4090,2388 ; 4109.65,2857 ccw(c4109.65,2887.76) R30.1@4131.4,2866.01 ; 4110.71,2861.77 cw(c4114.98,2846.09) R30.1@4129.44,2853.51 ; 4116.45,2857 cw(c4116.45,2835.86) R30.1@4131.4,2850.81 ; 4122.61,2865.01 cw(c4126.19,2851.84) R30.1@4138.33,2858.07 ; R30.1@4131.17,2865.77 cw(c4112.27,2883.55) 4113.06,2857.61 cw(c4113.86,2831.68) R30.1@4131.64,2850.58 ; R30.1@4137.41,2869.04 4093.21,2857 ; R30.1@4138.07,2847.7 4093.21,2857 ; R30.1@4139.4,2857.78 cw(c4156.21,2831.37) 4167.9,2860.41 ; R30.1@4139.39,2859.05 ccw(c4156.06,2885.98) 4168.04,2856.66 ; R30.1@4139.62,2858.83 ccw(c4153.79,2868.51) 4156.47,2851.56 ; R30.1@4139.64,2858.01 cw(c4153.39,2849.48) 4155.83,2865.48 ; R30.1@4139.71,2858.18 cw(c4150.77,2854.69) R30.1@4153.43,2865.98 ; R30.1@4139.7,2858.67 ccw(c4151.06,2862.82) R30.1@4153.93,2851.07 ; R30.1@4140.22,2869.09 4184.75,2858.6 ; R30.1@4140.31,2847.74 4184.75,2858.6 ; R30.1@4144.62,2849.25 cw(c4165.27,2815.55) 4174.49,2853.98 ; R30.1@4144.62,2867.57 ccw(c4164.62,2900.2) 4173.54,2862.99 ; R30.1@4144.59,2867.59 ccw(c4164.79,2900.73) 4173.95,2863.01 ; R30.1@4144.64,2849.26 cw(c4165.1,2816.09) 4174.09,2854.01 ; R30.1@4144.65,2867.55 ccw(c4168.83,2906.63) R31.2@4186.22,2864.09 ; R30.1@4144.77,2849.34 cw(c4169.06,2811.19) R31.2@4185.95,2853.15 ; R30.1@4146.57,2866.04 ccw(c4164.84,2884.46) 4164.95,2858.52 ccw(c4165.06,2832.57) R30.1@4146.63,2850.84 ; R30.1@4146.62,2850.83 cw(c4165.07,2832.47) 4165.01,2858.5 ; R30.1@4146.58,2866.03 ccw(c4164.82,2884.37) 4164.89,2858.5 ; R30.1@4147.76,2864.64 ccw(c4159.68,2873.11) 4159.72,2858.49 ccw(c4159.76,2843.93) R30.1@4147.81,2852.26 ; R30.1@4147.87,2864.47 ccw(c4168.23,2878.38) 4172.08,2854.03 ; R30.1@4148.13,2852.74 cw(c4167.4,2840.78) 4170.81,2863.2 ; R30.1@4148.16,2852.79 cw(c4159.78,2845.67) 4156.6,2858.92 ; R30.1@4148.18,2852.82 cw(c4159.35,2846.01) 4156.26,2858.72 ; R30.1@4148.82,2862.78 ccw(c4155.25,2865.64) 4155.25,2858.6 ; R30.1@4148.96,2854.36 cw(c4155.25,2851.8) 4155.25,2858.6 ; R30.1@4149.09,2862.1 ccw(c4161.63,2866.69) 4164.79,2853.72 ; R30.1@4149.25,2855.17 cw(c4161.08,2851.43) 4163.92,2863.5 ; 4155.83,2858.46 cw(c4158.71,2870.49) 4148.16,2864.03 ccw(c4159.15,2870.83) 4156.17,2858.26 ; 4165.05,2855.44 cw(c4175.53,2829.81) R31.2@4193.88,2850.55 ; 4165.3,2861.46 ccw(c4175.47,2886.72) R31.2@4193.78,2866.56 ; 4165.83,2853.98 cw(c4175.12,2815.98) R31.2@4195.42,2849.41 ; 4166.13,2862.98 ccw(c4175,2900.62) R31.2@4195.35,2867.74 ; 4174.48,2849.87 ccw(c4175.63,2865.33) R31.2@4190.61,2861.35 ; 4174.89,2858.56 cw(c4175,2832.38) R31.2@4193.43,2850.97 ; 4175.21,2858.56 ccw(c4175.11,2884.28) R31.2@4193.37,2866.17 ; 4175.36,2863.36 cw(c4178.47,2850.55) R31.2@4190.88,2854.98 ; 4175.64,2853.71 ccw(c4178.64,2866.23) R31.2@4190.83,2862.07 ; 4175.64,2863.49 cw(c4178.64,2850.97) R31.2@4190.83,2855.13 ; 4175.92,2853.58 ccw(c4178.82,2865.81) R31.2@4190.78,2861.92 ; 4179.95,2861.53 cw(c4187.42,2843.25) R31.2@4200.5,2858.04 ; 4180.1,2855.5 ccw(c4187.39,2873.59) R31.2@4200.5,2859.15 ; 4183.65,2858.86 cw(c4180.61,2845.98) R31.2@4191.86,2852.94 ; 4183.92,2858.4 ccw(c4180.89,2870.81) R31.2@4191.81,2864.18 ; R31.2@4186.15,2865.98 cw(c4188.99,2854.31) 4200.3,2858.35 ccw(c4189.08,2854.53) R31.2@4186.31,2866.05 ; R31.2@4186.31,2851.15 ccw(c4189.08,2862.67) 4200.29,2858.84 cw(c4189.18,2862.44) R31.2@4186.48,2851.07 ; R31.2@4186.49,2848.98 ccw(c4187.47,2862.19) R31.2@4200.28,2858.79 ; R31.2@4192.31,2864.92 cw(c4171.32,2880.18) 4175.37,2854.55 cw(c4179.42,2828.92) R31.2@4194.68,2849.91 ; R31.2@4192.34,2852.23 ccw(c4171.44,2836.85) 4175.35,2862.51 ccw(c4179.26,2888.16) R31.2@4194.63,2867.26 ; R31.2@4198.11,2868.95 4154.98,2851.33 ; R31.2@4198.17,2848.23 4154.99,2865.61 ; R31.2@4199.71,2869.27 4155.25,2858.48 ; R31.2@4199.74,2869.27 4155.25,2858.6 ; R31.2@4201.38,2869.34 4154.99,2865.61 ; R31.2@4201.44,2847.86 4154.98,2851.33 ; 4090,2384.84 cw(c4073.56,2384.84) 4085.18,2373.21 ccw(c4073.56,2384.84) 4090,2384.84 ; 4090,2384.84 ccw(c4106.44,2384.84) 4094.82,2373.21 cw(c4106.44,2384.84) 4090,2384.84 ; 4090,2388 4027,2451 4027,2825 4059,2857 4137.59,2857 R30.1@4139,2858.41 ; 4093.21,2857 R30.1@4139,2858.41 ; R30.1@4139,2858.41 4184.75,2858.6 ; R30.1@4139,2858.41 4139.19,2858.6 R31.2@4201,2858.6 ; 4154.98,2851.33 R31.2@4201,2858.6 ; 4154.99,2865.61 R31.2@4201,2858.6 ; 4155.25,2858.48 R31.2@4201,2858.6 ; 4155.25,2858.48 4199.77,2847.92 4155.25,2858.6 ; 4155.25,2858.6 R31.2@4201,2858.6 ; 4175.05,2858.6 cw(c4175.05,2832.65) R31.2@4193.4,2851 ; 4175.05,2858.6 ccw(c4175.05,2884.55) R31.2@4193.4,2866.2 ; 4175.05,2858.6 cw(c4175.05,2832.65) R31.2@4193.4,2851 ; 4175.05,2858.6 ccw(c4175.05,2884.55) R31.2@4193.4,2866.2 ; 4184.75,2858.6 cw(c4184.75,2851.69) R31.2@4191.11,2854.39 ; 4184.75,2858.6 ccw(c4184.75,2865.51) R31.2@4191.11,2862.8 ; 4184.75,2858.6 cw(c4184.75,2851.69) R31.2@4191.11,2854.39 ; 4184.75,2858.6 ccw(c4184.75,2865.51) R31.2@4191.11,2862.8 ; 4184.75,2858.6 cw(c4184.75,2851.69) R31.2@4191.11,2854.39 ; 4184.75,2858.6 ccw(c4184.75,2865.51) R31.2@4191.11,2862.8 ; 4184.75,2858.6 R31.2@4201,2858.6 ; 4184.75,2858.6 R31.2@4197.45,2868.74 ; 4184.75,2858.6 R31.2@4197.45,2848.46 ; 4184.75,2858.6 R31.2@4201,2858.6 ; 4184.75,2858.6 R31.2@4197.45,2868.74 ; 4184.75,2858.6 R31.2@4197.45,2848.46 ; 4184.75,2858.6 R31.2@4201,2858.6 ; 4184.75,2858.6 R31.2@4197.45,2868.74 ; 4184.75,2858.6 R31.2@4197.45,2848.46 ; R31.2@4193.42,2850.98 ccw(c4175.12,2832.58) 4175.05,2858.53 ccw(c4174.98,2884.48) R31.2@4193.38,2866.18 ; R30.1@4139.57,2857.92 cw(c4156.27,2843.71) 4154.51,2865.57 ccw(c4156.27,2843.71) R30.1@4139.57,2857.92 ; R30.1@4139.57,2858.9 ccw(c4156.13,2873.17) 4154.51,2851.36 cw(c4156.13,2873.17) R30.1@4139.57,2858.9 ; R30.1@4146.6,2850.81 cw(c4165.4,2832.01) 4165.4,2858.6 ccw(c4165.4,2832.01) R30.1@4146.6,2850.81 ; R30.1@4146.6,2866.01 ccw(c4164.49,2883.9) 4164.49,2858.6 cw(c4164.49,2883.9) R30.1@4146.6,2866.01 ; R30.1@4147.14,2865.42 ccw(c4182.01,2895.44) 4178.58,2849.56 cw(c4182.01,2895.44) R30.1@4147.14,2865.42 ; R30.1@4147.18,2851.44 cw(c4182.27,2821.58) 4178.57,2867.5 ccw(c4182.27,2821.58) R30.1@4147.18,2851.44
NetR32_2: R32.2 R33.1 U3.11 | length 2608.1
  Top Layer w10: R33.1@4403.56,2869.15 4450.02,2865.68 ; R33.1@4403.62,2847.67 4450.01,2851.4 ; R33.1@4404.5,2857.86 cw(c4417.61,2843.41) 4424.9,2861.51 ; R33.1@4404.5,2858.97 ccw(c4417.58,2873.76) 4425.05,2855.48 ; R33.1@4404.71,2858.17 cw(c4415.92,2854.34) R33.1@4418.69,2865.86 ; R33.1@4405.26,2847.74 4449.75,2858.41 4405.26,2869.08 4449.75,2858.53 ; R33.1@4405.29,2847.74 4449.75,2858.53 ; R33.1@4406.83,2868.78 4450.01,2851.4 ; R33.1@4406.89,2848.06 4450.02,2865.68 ; R33.1@4409.58,2867.6 ccw(c4429.88,2901.03) 4439.17,2863.03 ; R33.1@4409.65,2849.27 cw(c4430,2816.38) 4438.87,2854.02 ; R33.1@4410.32,2867.1 ccw(c4425.58,2888.09) 4429.63,2862.46 ccw(c4433.68,2836.83) R33.1@4412.69,2852.09 ; R33.1@4410.37,2849.75 cw(c4425.74,2828.85) 4429.65,2854.5 cw(c4433.56,2880.15) R33.1@4412.66,2864.78 ; R33.1@4411.12,2866.46 ccw(c4429.47,2887.2) 4439.95,2861.57 ; R33.1@4411.22,2850.45 cw(c4429.53,2830.29) 4439.7,2855.55 ; R33.1@4411.57,2866.04 ccw(c4430,2884.63) 4430.11,2858.45 ; R33.1@4411.6,2850.81 cw(c4429.95,2832.46) 4429.95,2858.41 cw(c4429.95,2884.36) R33.1@4411.6,2866.01 ; R33.1@4411.62,2850.83 cw(c4430.02,2832.53) 4429.95,2858.48 cw(c4429.88,2884.43) R33.1@4411.58,2866.03 ; R33.1@4411.63,2850.84 cw(c4429.89,2832.73) 4429.79,2858.45 ; R33.1@4413.14,2864.06 ccw(c4424.39,2871.02) 4421.35,2858.15 ; R33.1@4413.19,2852.83 cw(c4424.11,2846.2) 4421.08,2858.61 ; R33.1@4414.12,2862.02 ccw(c4426.53,2866.46) 4429.64,2853.65 ; R33.1@4414.17,2854.94 cw(c4426.36,2850.78) 4429.36,2863.3 ; R33.1@4414.17,2861.88 ccw(c4426.36,2866.04) 4429.36,2853.52 ; R33.1@4414.22,2855.09 cw(c4426.18,2851.2) 4429.08,2863.43 ; R33.1@4414.39,2855.65 cw(c4429.37,2851.68) 4430.52,2867.14 ; R33.1@4418.52,2865.94 ccw(c4415.82,2854.56) 4404.71,2858.18 cw(c4417.53,2854.82) R33.1@4418.51,2868.03 ; R33.1@4418.69,2850.96 cw(c4415.92,2862.48) 4404.71,2858.65 ccw(c4416.01,2862.7) R33.1@4418.85,2851.03 ; R33.1@4418.78,2852.92 cw(c4436.17,2810.37) R32.2@4460.35,2849.46 ; R33.1@4419.05,2863.86 ccw(c4435.94,2905.81) R32.2@4460.23,2867.66 ; 4430.51,2863.03 ccw(c4439.73,2901.46) R32.2@4460.38,2867.76 ; 4430.91,2863 ccw(c4439.9,2900.92) R32.2@4460.36,2867.75 ; 4431.05,2853.99 cw(c4440.21,2816.27) R32.2@4460.41,2849.42 ; 4431.46,2854.02 cw(c4440.38,2816.81) R32.2@4460.38,2849.43 ; 4432.92,2862.98 cw(c4436.77,2838.63) R32.2@4457.13,2852.54 ; 4434.19,2853.81 ccw(c4437.6,2876.23) R32.2@4456.87,2864.27 ; 4436.96,2860.35 cw(c4448.94,2831.03) R32.2@4465.61,2857.96 ; 4437.1,2856.6 ccw(c4448.79,2885.63) R32.2@4465.6,2859.23 ; 4439.6,2858.41 ccw(c4439.6,2885) 4458.4,2866.2 cw(c4439.93,2884.53) 4439.99,2858.51 ; 4440.11,2858.51 cw(c4440.18,2832.64) 4458.42,2850.98 ccw(c4440.51,2833.11) 4440.51,2858.41 ; 4440.21,2863.28 cw(c4443.37,2850.32) R32.2@4455.91,2854.91 ; 4441.08,2853.5 ccw(c4443.92,2865.58) R32.2@4455.75,2861.84 ; 4448.4,2858.09 ccw(c4445.22,2871.34) R32.2@4456.84,2864.22 ; 4448.53,2865.45 cw(c4451.21,2848.5) R32.2@4465.38,2858.18 ; 4448.74,2858.29 ccw(c4445.65,2871) R32.2@4456.82,2864.19 ; 4448.83,2858.75 cw(c4445.85,2846.17) R32.2@4456.85,2852.96 ; 4449.17,2851.53 ccw(c4451.61,2867.53) R32.2@4465.36,2858.99 ; 4449.17,2858.55 cw(c4446.29,2846.51) R32.2@4456.84,2852.98 ; R32.2@4451.07,2865.94 cw(c4453.94,2854.18) R32.2@4465.3,2858.34 ; R32.2@4451.57,2851.03 ccw(c4454.23,2862.32) R32.2@4465.29,2858.82 ; R32.2@4457.19,2864.75 cw(c4445.24,2873.08) 4445.28,2858.52 cw(c4445.32,2843.9) R32.2@4457.24,2852.37 ; R32.2@4458.37,2866.17 cw(c4439.94,2884.44) 4440.05,2858.49 cw(c4440.16,2832.54) R32.2@4458.43,2850.97 ; R32.2@4464.69,2869.27 4420.25,2858.41 ; R32.2@4464.78,2847.92 4420.25,2858.41 ; R32.2@4466,2858.6 4420.25,2858.41 ; R32.2@4473.6,2851 cw(c4491.49,2833.11) 4491.49,2858.41 ; R32.2@4473.6,2866.2 ccw(c4492.4,2885) 4492.4,2858.41 ; U3.11@4535.18,2737.38 ccw(c4523.56,2749.01) 4540,2749.01 ccw(c4556.44,2749.01) U3.11@4544.82,2737.38 ; U3.11@4540,2700.09 4540,2846 4527.59,2858.41 R33.1@4404,2858.41 ; R33.1@4404,2858.41 4420.25,2858.41 ; R33.1@4404,2858.41 4449.75,2858.53 ; R33.1@4404,2858.41 4420.25,2858.41 ; R33.1@4404,2858.41 4450.02,2865.68 ; R33.1@4404,2858.41 4420.25,2858.41 ; R33.1@4404,2858.41 4450.01,2851.4 ; R33.1@4407.55,2848.27 4420.25,2858.41 ; R33.1@4407.55,2848.27 4420.25,2858.41 ; R33.1@4407.55,2848.27 4420.25,2858.41 ; R33.1@4407.55,2868.55 4420.25,2858.41 ; R33.1@4407.55,2868.55 4420.25,2858.41 ; R33.1@4407.55,2868.55 4420.25,2858.41 ; R33.1@4413.89,2854.2 cw(c4420.25,2851.5) 4420.25,2858.41 ; R33.1@4413.89,2854.2 cw(c4420.25,2851.5) 4420.25,2858.41 ; R33.1@4413.89,2854.2 cw(c4420.25,2851.5) 4420.25,2858.41 ; R33.1@4413.89,2862.62 ccw(c4420.25,2865.32) 4420.25,2858.41 ; R33.1@4413.89,2862.62 ccw(c4420.25,2865.32) 4420.25,2858.41 ; R33.1@4413.89,2862.62 ccw(c4420.25,2865.32) 4420.25,2858.41 ; 4426.42,2867.44 cw(c4422.99,2821.56) 4457.86,2851.58 ccw(c4422.99,2821.56) 4426.42,2867.44 ; 4426.43,2849.5 ccw(c4422.73,2895.42) 4457.82,2865.56 cw(c4422.73,2895.42) 4426.43,2849.5 ; R32.2@4450.49,2851.44 ccw(c4448.73,2873.29) 4465.43,2859.08 cw(c4448.73,2873.29) R32.2@4450.49,2851.44 ; R32.2@4450.49,2865.65 cw(c4448.87,2843.84) 4465.43,2858.11 ccw(c4448.87,2843.84) R32.2@4450.49,2865.65
NewNet: 
NRST: J3.3 J12.3 RESET.1 | length 4267.7
  Top Layer w10: RESET.1@2588.58,3232.35 RESET.1@2587.58,2901.65 2588.58,2737.58 2560,2709 2413,2709 2392,2688 2392,1810 2434,1768 3220,1768 3233,1755 3233,1588 3250,1571 3543,1571 ; 3556.22,1584.22 ccw(c3518.67,1621.78) J3.3@3570.75,1632.16 ; J3.3@3560.95,1630.2 cw(c3496.62,1617.38) 3543,1571 ; J3.3@3561,1640.05 3585,1694.53 ; J12.3@3561,1741.95 3585,1687.47 ; J3.3@3567.66,1652.34 ccw(c3525.79,1694.21) 3585,1694.21 ccw(c3644.21,1694.21) J3.3@3602.34,1652.34 ; 3569.45,1597.45 ccw(c3540.72,1626.17) J3.3@3580.56,1634.11 ; J3.3@3570.58,1636.77 3585,1694.53 ; J12.3@3570.58,1745.23 3585,1687.47 ; J3.3@3574.73,1645.27 ccw(c3549.93,1670.07) 3585,1670.07 ccw(c3620.07,1670.07) J3.3@3595.27,1645.27 ; J3.3@3599.42,1636.77 3585,1694.53 ; J12.3@3599.42,1745.23 3585,1687.47 ; J3.3@3609,1640.05 3585,1694.53 ; J12.3@3609,1741.95 3585,1687.47 ; 3543,1571 3585,1613 J3.3@3585,1635 J12.3@3585,1747 3585,1687.47 ; 3585,1687.79 cw(c3644.21,1687.79) 3602.34,1729.66 ccw(c3644.21,1687.79) 3585,1687.79 ; 3585,1687.79 ccw(c3525.79,1687.79) 3567.66,1729.66 cw(c3525.79,1687.79) 3585,1687.79 ; 3585,1711.93 cw(c3620.07,1711.93) 3595.27,1736.73 ccw(c3620.07,1711.93) 3585,1711.93 ; 3585,1711.93 ccw(c3549.93,1711.93) 3574.73,1736.73 cw(c3549.93,1711.93) 3585,1711.93
OUT1: J7.2 U3.3 | length 996
  Top Layer w30: U3.3@4190,2335.91 4190,2449 ; U3.3@4190,2368.39 4190,2449 ; J7.2@4810,2222.3 4721,2311.3 4721,2417 4657,2481 4222,2481 4190,2449
OUT2: J7.1 U3.8 | length 770.2
  Top Layer w30: U3.8@4440,2335.91 4440,2404 ; U3.8@4440,2368.39 4440,2404 ; J7.1@4810,2025.45 4669,2166.45 4669,2371 4612,2428 4464,2428 4440,2404
OUT3: J7.4 U3.13 | length 515.8
  Top Layer w30: U3.13@4440,2667.61 4440,2619 ; U3.13@4440,2700.09 4440,2619 ; J7.4@4810,2616 4792,2598 4461,2598 4440,2619
OUT4: J7.3 U3.18 | length 891.1
  Top Layer w30: U3.18@4190,2667.61 4190,2582 ; U3.18@4190,2700.09 4190,2582 ; J7.3@4810,2419.15 4690.15,2539 4233,2539 4190,2582
P23: R0.1 U2.23 | length 356.9
  Top Layer w10: U2.23@3783,2863.1 3866.1,2863.1 3890,2887 ; U2.23@3799.73,2863.1 3836.62,2863.1 ; R0.1@3918.51,2876.42 3890,2887 ; R0.1@3918.51,2897.58 3890,2887 ; 3890,2887 R0.1@3920.41,2887 3890,2887 ; 3894.46,2887 cw(c3894.46,2861.05) 3912.81,2879.4 ccw(c3894.46,2861.05) 3894.46,2887 ; 3894.46,2887 ccw(c3894.46,2912.95) 3912.81,2894.6 cw(c3894.46,2912.95) 3894.46,2887
PWM0: 0.3 R6.2 | length 581
  Top Layer w10: 0.3@2754.78,2115.92 2778,2146 ; 0.3@2763.74,2110.78 2778,2146 ; 0.3@2767.9,2130.35 ccw(c2760.83,2146) 2778,2146 ; 0.3@2778,2108 2778,2146 ; 0.3@2788.1,2130.35 cw(c2795.17,2146) 2778,2146 ; 0.3@2792.26,2110.78 2778,2146 ; 0.3@2801.22,2115.92 2778,2146 ; R6.2@2863.39,2273.88 2874,2242 ; R6.2@2884.61,2273.88 2874,2242 ; 2778,2146 2874,2242 ; 2874,2242 R6.2@2874,2275.6 2874,2242 ; 2874,2249.65 cw(c2899.95,2249.65) 2881.6,2268 ccw(c2899.95,2249.65) 2874,2249.65 ; 2874,2249.65 ccw(c2848.05,2249.65) 2866.4,2268 cw(c2848.05,2249.65) 2874,2249.65
PWM1: 1.3 R7.2 | length 853
  Top Layer w10: 1.3@2854,2113.05 2878,2167.53 ; 1.3@2860.66,2125.34 ccw(c2818.79,2167.21) 2878,2167.21 ccw(c2937.21,2167.21) 1.3@2895.34,2125.34 ; 1.3@2863.58,2109.77 2878,2167.53 ; 1.3@2867.73,2118.27 ccw(c2842.93,2143.07) 2878,2143.07 ccw(c2913.07,2143.07) 1.3@2888.27,2118.27 ; 1.3@2878,2108 2878,2185 2925.67,2232.67 ; 1.3@2892.42,2109.77 2878,2167.53 ; 1.3@2902,2113.05 2878,2167.53 ; R7.2@2915,2274.25 2925.67,2232.67 ; R7.2@2918.27,2261.51 cw(c2928.99,2264.26) R7.2@2925.88,2274.88 ; 2920.84,2251.48 cw(c2931.91,2254.32) R7.2@2928.69,2265.29 ; R7.2@2922.64,2265.29 cw(c2919.42,2254.32) 2930.49,2251.48 ; R7.2@2925.46,2274.88 cw(c2922.34,2264.26) R7.2@2933.06,2261.51 ; R7.2@2936.33,2274.25 2925.67,2232.67 ; 2925.67,2232.67 R7.2@2925.67,2275.6 2925.67,2232.67 ; 2925.67,2249.65 cw(c2951.61,2249.65) 2933.27,2268 ccw(c2951.61,2249.65) 2925.67,2249.65 ; 2925.67,2249.65 ccw(c2899.72,2249.65) 2918.07,2268 cw(c2899.72,2249.65) 2925.67,2249.65
PWM2: 2.3 R8.2 | length 1053.6
  Top Layer w10: 2.3@2953.94,2112.78 2977.33,2167.53 ; 2.3@2960.46,2125.15 ccw(c2918.13,2166.55) 2977.34,2167.21 ccw(c3036.55,2167.87) 2.3@2995.15,2125.54 ; 2.3@2960.66,2125.34 ccw(c2920.4,2165.6) 2977.33,2165.6 ; 2.3@2963.56,2109.61 2977.33,2167.53 ; R8.2@2966.66,2274.34 2977.33,2229.85 ; 2.3@2967.61,2118.16 ccw(c2942.54,2142.68) 2977.61,2143.07 ccw(c3012.68,2143.46) 2.3@2988.16,2118.39 ; 2.3@2967.73,2118.27 ccw(c2944.54,2141.46) 2977.33,2141.46 ; R8.2@2969.88,2260.91 cw(c2981.4,2263.68) R8.2@2977.57,2274.89 ; 2972.44,2250.23 cw(c2984.96,2253.24) R8.2@2980.8,2265.43 ; R8.2@2973.86,2265.43 cw(c2969.7,2253.24) 2982.22,2250.23 ; R8.2@2977.09,2274.89 cw(c2973.26,2263.68) R8.2@2984.79,2260.91 ; 2977.33,2144.68 ccw(c3014.68,2144.68) 2.3@2988.27,2118.27 ; 2977.33,2168.82 ccw(c3038.82,2168.82) 2.3@2995.34,2125.34 ; R8.2@2988.01,2274.34 2977.33,2229.85 ; 2.3@2992.4,2109.93 2977.33,2167.53 ; 2.3@3001.94,2113.32 2977.33,2167.53 ; 2977.33,2167.53 2.3@2978,2108 2977.33,2108.67 R8.2@2977.33,2275.6 2977.33,2229.85 ; 2977.33,2249.65 cw(c3003.28,2249.65) 2984.93,2268 ccw(c3003.28,2249.65) 2977.33,2249.65 ; 2977.33,2249.65 ccw(c2951.39,2249.65) 2969.73,2268 cw(c2951.39,2249.65) 2977.33,2249.65
PWM3: 3.3 R9.2 | length 774.4
  Top Layer w10: R9.2@3018.35,2274.14 3029,2236 ; R9.2@3039.65,2274.14 3029,2236 ; 3.3@3054,2113.05 3078,2167.53 ; 3.3@3060.66,2125.34 ccw(c3018.79,2167.21) 3078,2167.21 ccw(c3137.21,2167.21) 3.3@3095.34,2125.34 ; 3.3@3063.58,2109.77 3078,2167.53 ; 3.3@3067.73,2118.27 ccw(c3042.93,2143.07) 3078,2143.07 ccw(c3113.07,2143.07) 3.3@3088.27,2118.27 ; 3.3@3078,2108 3078,2187 3029,2236 ; 3.3@3092.42,2109.77 3078,2167.53 ; 3.3@3102,2113.05 3078,2167.53 ; 3029,2236 R9.2@3029,2275.6 3029,2236 ; 3029,2249.65 cw(c3054.95,2249.65) 3036.6,2268 ccw(c3054.95,2249.65) 3029,2249.65 ; 3029,2249.65 ccw(c3003.05,2249.65) 3021.4,2268 cw(c3003.05,2249.65) 3029,2249.65